# Altium PCB DE-300617.PcbDoc
Units mil, origin at the board's own origin, x right, y up, seen from the top; angles counter-clockwise.
Board outline 2362.2 x 2559.06 mil, 2 copper layers (Top Layer, Bottom Layer); 90 components, 61 nets, 277 pads, 54 vias.
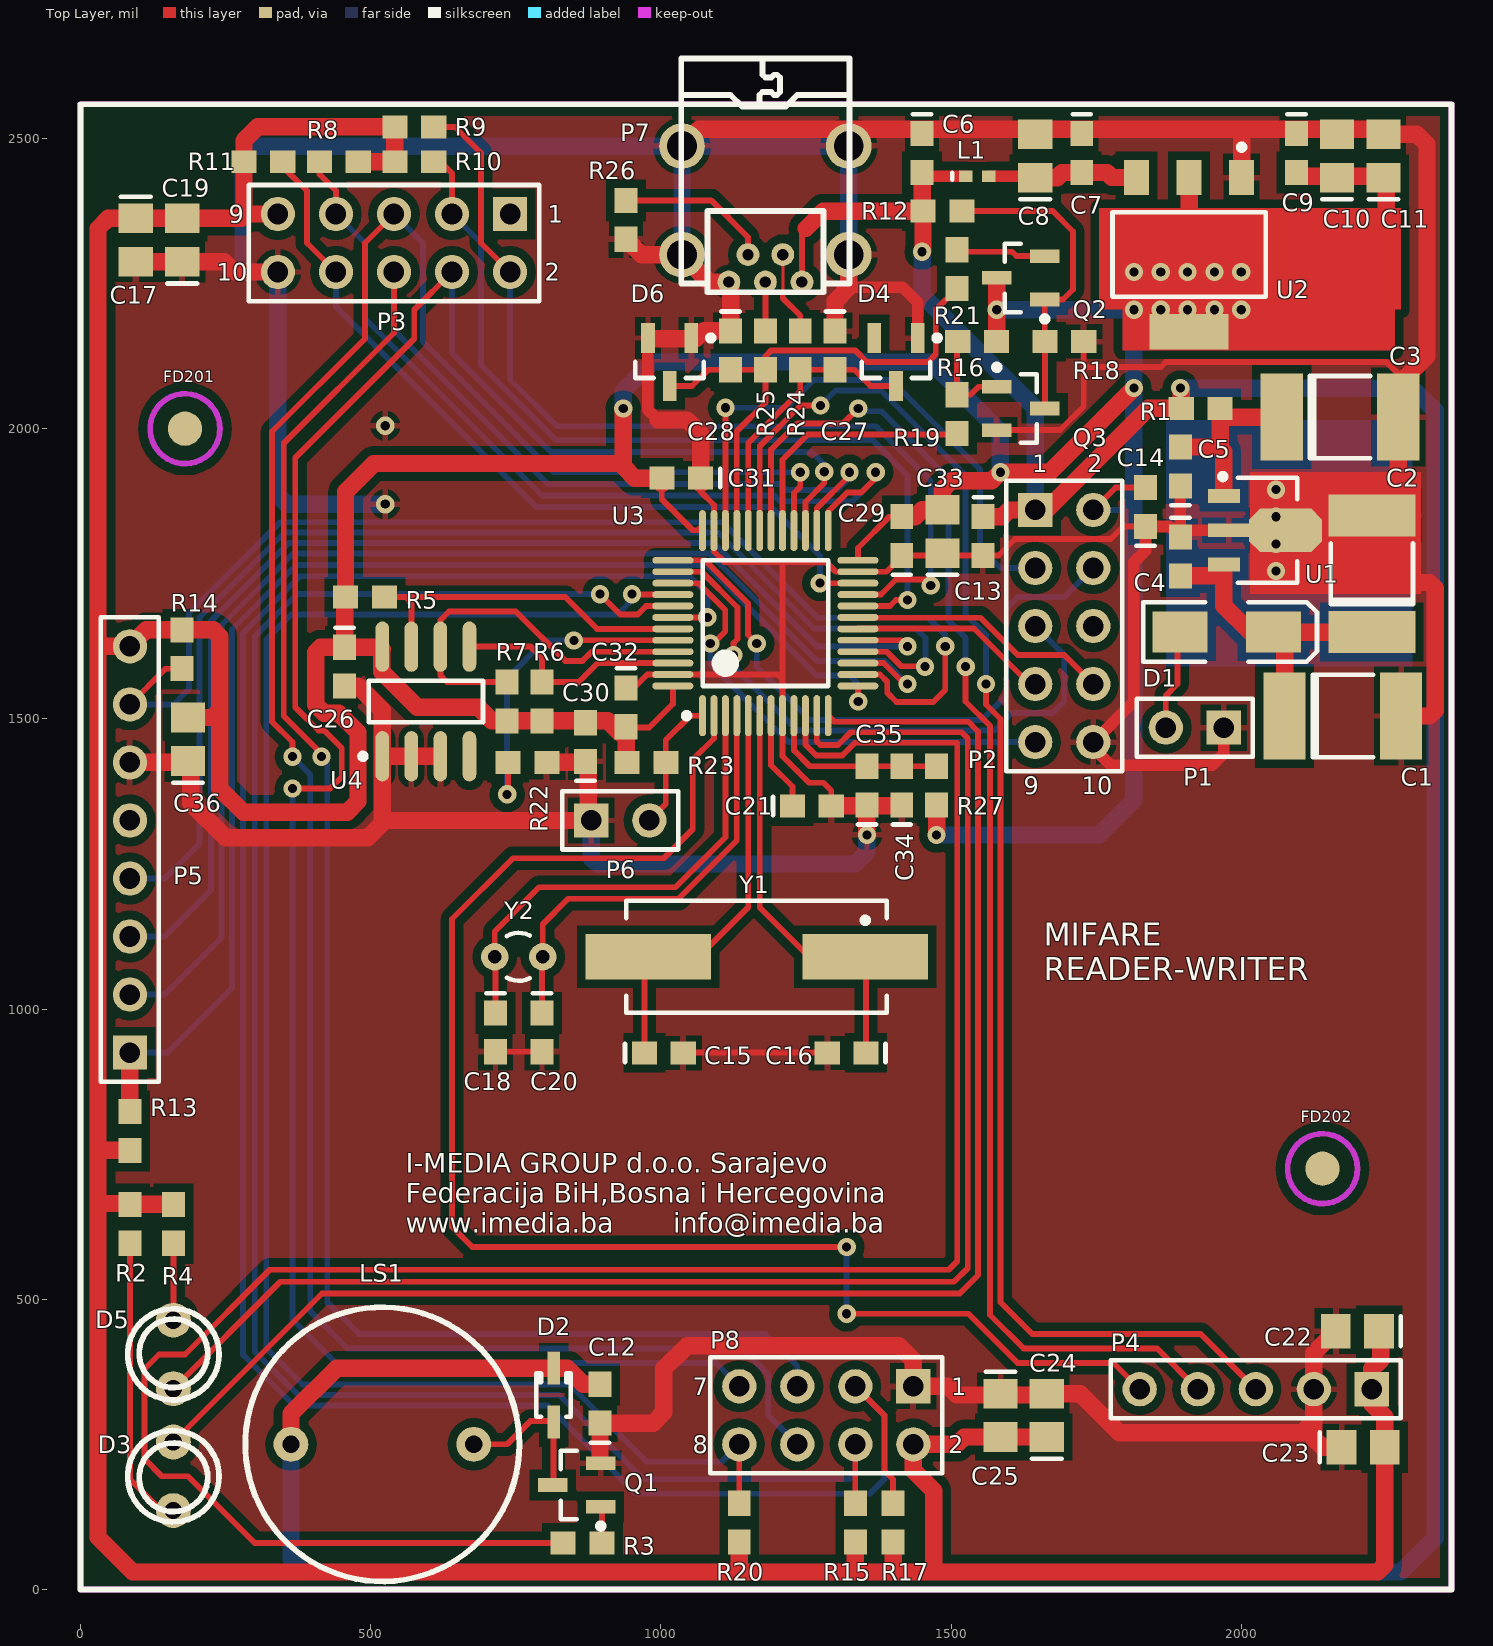
[diagram p0: Top Layer view]
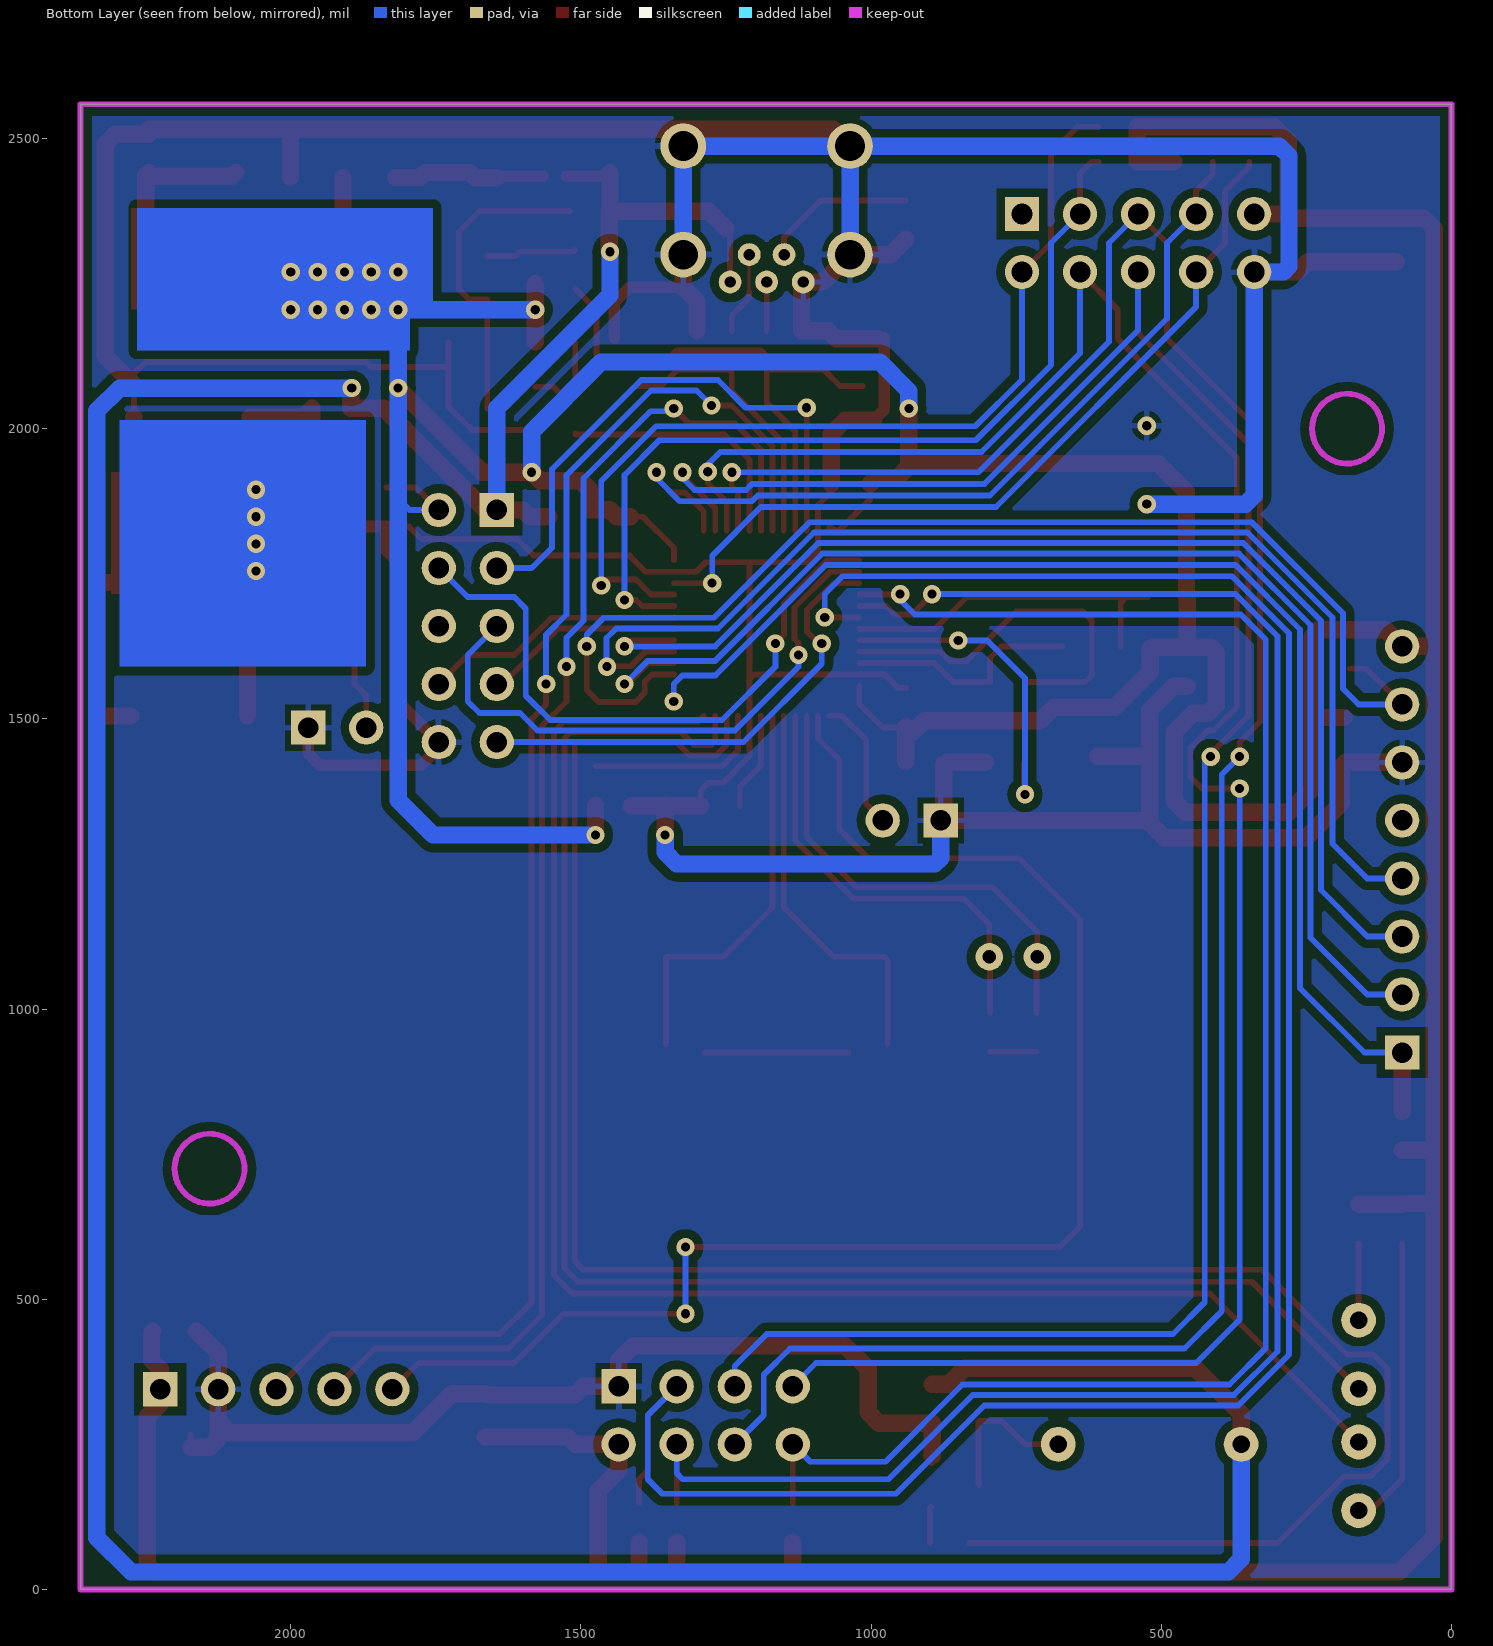
[diagram p1: Bottom Layer view, seen from below]

## Layer stack, top to bottom
Top Solder: solder mask 0.4, Solder Resist, Dk 3.5
Top Layer: signal copper 1.4
Dielectric 1: dielectric 12.6, FR-4, Dk 4.8
Bottom Layer: signal copper 1.4
Bottom Solder: solder mask 0.4, Solder Resist, Dk 3.5

## Board outline
0,0 2362.2,0 2362.2,2559.06 0,2559.06

## Design rules (kind name [scope] priority, off if disabled: settings)
Clearance [All] p1: gap=8 except(5: Arc-SMDPad Track-SMDPad SMDPad-SMDPad; 10: Arc-Arc Arc-Via Track-Via SMDPad-Via THPad-Via Via-Via; 15: Arc-Poly Track-Poly SMDPad-Poly THPad-Poly Via-Poly Fill-Poly Poly-Poly)
PolygonConnect [All] p1: connectstyle=Relief reliefconductorwidth=10 reliefentries=4 polygonreliefangle="90 Angle" airgapwidth=10
RoutingVias [All] p1: holewidth=15.75 width=31.5 viastyle="Through Hole" minholewidth=11.81 minwidth=23.62 maxholewidth=31.5 maxwidth=59.06
SolderMaskExpansion [All] p1: expansion=4
Width [All] p1: maxlimit=157.48 minlimit=5 preferedwidth=30
30 further rules are at their usual default settings.

## Components (designator, comment, footprint, x,y, rotation, side; value= is the part's Value field where it differs from the comment)
C1 "22uF" F 2175,1505 r0 top
C2 "22uF" F 2225,1750 r90 top
C3 "22uF" F 2170,2020 r0 top
C4 "100nF" 0603 1895,1780 r270 top
C5 "100nF" 0603 1895,1935 r90 top
C6 "10nF" 0603 1450,2475 r270 top
C7 "100nF" 0603 1725,2475 r270 top
C8 "" 0805 1645,2470 r90 top
C9 "100nF" 0603 2095,2475 r270 top
C10 "" 0805 2165,2470 r90 top
C11 "" 0805 2245,2470 r90 top
C12 "100nF" 0603 895,320 r90 top
C13 "100nF" 0603 1555,1815 r270 top
C14 "100nF" 0603 1835,1865 r90 top
C15 "22pF" 0603 1005,924.57 r0 top
C16 "22pF" 0603 1320,924.57 r180 top
C17 "" 0805 95,2325 r270 top
C18 "6p8" 0603 715,960 r270 top
C19 "" 0805 175,2325 r90 top
C20 "6p8" 0603 795,960 r270 top
C21 "100nF" 0603 1260,1350 r0 top
C22 "" 0805 2200,445 r180 top
C23 "" 0805 2210,245 r0 top
C24 "" 0805 1665,300 r90 top
C25 "" 0805 1585,300 r270 top
C26 "100nF" 0603 455,1590 r270 top
C27 "22pF" 0603 1300,2135 r270 top
C28 "22pF" 0603 1120,2135 r270 top
C29 "100nF" 0603 1415,1815 r90 top
C30 "100nF" 0603 870,1460 r90 top
C31 "100nF" 0603 1035,1915 r180 top
C32 "100nF" 0603 940,1520 r270 top
C33 "4u7" 0805 1485,1822.87 r90 top
C34 "1uF" 0603 1415,1385 r90 top
C35 "100nF" 0603 1355,1385 r90 top
C36 "C0805" 0805 185,1465 r90 top
D1 "1N4001" SMA 1975,1650 r0 top
D2 "NF" SOD323 815,335 r90 top
D3 "LED_GREEN" "LED 3mm" 160,195 r270 top
D4 "BZX84-3V6" SOT23_N 1405,2115 r270 top
D5 "LED_RED" "LED 3mm" 160,405 r90 top
D6 "BZX84-3V6" SOT23_N 1015,2115 r270 top
FD201 "Fiducial" Fiducial 180,2000 r270 top
FD202 "Fiducial" Fiducial 2140,725 r270 top (schematic designator FD201)
L1 "BLM15AG121" 0402-A 1545,2435 r0 top
LS1 "Buzzer 5Vdc" BUZZER 520,250 r0 top
P1 "DC_PWR" HDR1X2 1970,1485 r180 top
P2 "EXTEND" HDR2X5 1645,1860 r270 top
P3 "ENC28J60" HDR2X5 740,2370 r180 top
P4 "HC12_RADIO" HDR1X5 2225,345 r180 top
P5 "RC522" HDR1X8 85,925 r90 top
P6 "3V_BATT" HDR1X2 880,1325 r0 top
P7 "USB" "USB mini B" 1180,2300 r180 top
P8 "NRF24L01" HDR2X4 1435,350 r180 top
Q1 "MMBT2222" SOT23_N 855,180 r180 top
Q2 "MMBT2222" SOT23_N 1620,2260 r180 top
Q3 "MMBT2222" SOT23_N 1620,2035 r0 top
R1 "0R" ERA-0603 1930,2035 r0 top
R2 "220R" ERA-0603 85,630 r270 top
R3 "1K" ERA-0603 865,80 r180 top
R4 "220R" ERA-0603 160,630 r270 top
R5 "10K" ERA-0603 490,1710 r180 top
R6 "4K7" ERA-0603 795,1530 r270 top
R7 "4K7" ERA-0603 735,1530 r270 top
R8 "10K" ERA-0603 445,2460 r0 top
R9 "10K" ERA-0603 575,2520 r180 top
R10 "10K" ERA-0603 575,2460 r180 top
R11 "10K" ERA-0603 315,2460 r180 top
R12 "10K" ERA-0603 1485,2375 r0 top
R13 "10K" ERA-0603 85,790 r270 top
R14 "10K" ERA-0603 175,1620 r90 top
R15 "10K" ERA-0603 1335,115 r270 top
R16 "47K" ERA-0603 1545,2150 r180 top
R17 "10K" ERA-0603 1400,115 r270 top
R18 "33K" ERA-0603 1695,2150 r0 top
R19 "1K" ERA-0603 1510,2025 r90 top
R20 "10K" ERA-0603 1135,115 r270 top
R21 "1K5" ERA-0603 1510,2275 r90 top
R22 "10K" ERA-0603 770,1425 r0 top
R23 "0R" ERA-0603 975,1425 r180 top
R24 "22R" ERA-0603 1240,2135 r90 top
R25 "22R" ERA-0603 1180,2135 r90 top
R26 "100K" ERA-0603 940,2360 r90 top
R27 "0R" ERA-0603 1475,1385 r270 top
U1 "L78L05ACUTR" SOT-89_N 2045,1825 r0 top
U2 "REG1117-3.3" ZZ311 1910,2300 r180 top
U3 "STM32F103C8T6" STM-LQFP48_N 1180,1665 r90 top
U4 "FT24C128A" SOIC-SN8_N 595,1530 r90 top
Y1 "4MHz" HC49/4H_SMX 1165,1090 r180 top
Y2 "32.768MHz" R26 755,1090 r270 top

## Footprints (in the part's own frame and the unit in brackets; to place one, negate y for a bottom-side part, rotate by r counter-clockwise, add the part's x,y. Pads: shape width x height; smd on the part's side, far side on the other; paste and mask are expansions set on the pad)
0402-A [mm] "Chip Inductor, Body 1.0x0.5mm, IPC High Density"
  rect 0.6x0.5 smd: 1(-0.5,0) 2(0.5,0)
  silkscreen extent -1.1,-0.15 -1.1,0.15, body extent -0.55,-0.3 0.55,0.3, height 0.55
0603 [mm] "Chip Capacitor; Body 1.6 x 0.8 mm (LxW typ)"
  rect 1.1x1 smd: 1(-0.85,0) 2(0.85,0)
  silkscreen extent -1.7,-0.4 -1.7,0.4
0805 [mm] "Chip Capacitor; Body 2.0 x 1.2 mm (LxW typ)"
  rect 1.3x1.5 smd: 1(-0.95,0) 2(0.95,0)
  silkscreen extent -1.9,-0.65 -1.9,0.65
BUZZER [mil] "5Vdc PCB buzzer"
  round 60 hole 30: 1(-157.48,0) 2(157.48,0)
  silkscreen extent -236,-236 236,236, body extent -236,-236 236,236, height 378
ERA-0603 [mm] "Chip Resistor; Body 1.6 x 0.8 mm (LxW typ)"
  rect 1.1x1 smd: 1(-0.85,0) 2(0.85,0)
F [mm] "Chip Capacitor; Body 5.59 x 3.43 mm (LxW typ)"
  rect 1.85x3.8 smd: 1(-2.55,0) 2(2.55,0)
  silkscreen extent -1.33,-1.8 1.33,1.8
Fiducial [mm] "Pick and place machine mark"
  round 1.5 smd paste+0 mask+0.8: 3(0,0)
  Keep-Out Layer circle w0.254: c0,0 r1.529
HC49/4H_SMX [mm] "Surface Mount Quartz Crystal; Body 13.4 (inc. leads) x 4.9 mm (LxW max)"
  rect 5.5x2 smd: 1(-4.75,0) 2(4.75,0)
  silkscreen extent -5.7,-2.45 5.7,2.45
HDR1X2 [mm] "Connector; Header; 2 Position"
  rect 1.5x1.5 hole 0.9: 1(0,0)
  round 1.5 hole 0.9: 2(2.54,0)
  silkscreen extent -1.27,-1.27 3.81,1.27
HDR1X5 [mm] "Connector; Header; 5 Position"
  rect 1.5x1.5 hole 0.9: 1(0,0)
  round 1.5 hole 0.9: 2(2.54,0) 3(5.08,0) 4(7.62,0) 5(10.16,0)
  silkscreen extent -1.27,-1.27 11.43,1.27
HDR1X8 [mm] "Connector; Header; 8 Position"
  rect 1.5x1.5 hole 0.9: 1(0,0)
  round 1.5 hole 0.9: 2(2.54,0) 3(5.08,0) 4(7.62,0) 5(10.16,0) 6(12.7,0) 7(15.24,0) 8(17.78,0)
  silkscreen extent -1.27,-1.27 19.05,1.27
HDR2X4 [mm] "Connector; Header; 4x2 Position"
  rect 1.5x1.5 hole 0.9: 1(0,0)
  round 1.5 hole 0.9: 2(0,2.54) 3(2.54,0) 4(2.54,2.54) 5(5.08,0) 6(5.08,2.54) 7(7.62,0) 8(7.62,2.54)
  silkscreen extent -1.27,-1.27 8.89,3.81
HDR2X5 [mm] "Connector; Header; 5x2 Position"
  rect 1.5x1.5 hole 0.9: 1(0,0)
  round 1.5 hole 0.9: 2(0,2.54) 3(2.54,0) 4(2.54,2.54) 5(5.08,0) 6(5.08,2.54) 7(7.62,0) 8(7.62,2.54) 9(10.16,0) 10(10.16,2.54)
  silkscreen extent -1.27,-1.27 11.43,3.81
"LED 3mm" [mil] "LED 3mm"
  round 60 hole 30: 1(-59.06,0) 2(59.06,0)
  silkscreen extent -79,-79 79,79
R26 [mm] "Crystal, Thru-Hole; 2 Leads; Body 2.1 x 6.2 mm (Dia.xH)"
  round 1.2 hole 0.6: 1(0,1.05) 2(0,-1.05)
  silkscreen extent -1.05,-0.53 1.05,0.48
SMA [mm] "DO-214-AC/SMA; 2 C-Bend Leads; Body 5 x 2.7 mm, inc. leads (LxW)"
  rect 2.4x1.8 smd: 1(-2.05,0) 2(2.05,0)
  silkscreen extent -3.65,-1.3 3.95,1.3
SOD323 [mm] "SOD-323/SC-76; 2 Leads; Body 1.7 x 1.3 mm, (LxW)"
  rect 1.45x0.55 smd: 1(1.175,0) 2(-1.175,0)
  silkscreen extent -0.95,-0.75 0.95,0.75
SOIC-SN8_N [mm] "SOIC, 8-Leads, Body 4.9x3.8mm, Pitch 1.27mm, IPC Medium Density"
  oval 2.2x0.6 smd: 1(-2.4,1.905) 2(-2.4,0.635) 3(-2.4,-0.635) 4(-2.4,-1.905) 5(2.4,-1.905) 6(2.4,-0.635) 7(2.4,0.635) 8(2.4,1.905)
  silkscreen extent -2.52,-2.5 0.9,2.88, body extent -2,-2.5 2,2.5, height 1.75
SOT23_N [mm] "SOT23, 3-Leads, Body 2.9x1.3mm, Pitch 0.95mm, Lead Span 2.3mm, IPC Medium Density"
  rect 1.3x0.6 smd: 1(-1.05,0.95) 2(-1.05,-0.95) 3(1.05,0)
  silkscreen extent -1.17,-1.5 0.7,1.93, body extent -0.7,-1.5 0.7,1.5, height 1.1
SOT-89_N [mm] "SOT89, 3-Leads, Body 4.5x2.4 mm, Pitch 1.5mm, Lead Span 4.1mm, IPC Medium Density"
  rect 1.4x0.6 smd: 1(-1.9,1.5) 3(-1.9,-1.5)
  rect 1.8x0.6 smd: 2(-1.7,0)
  oct 3.2x1.9 smd: 2(0.8,0)
  silkscreen extent -2.07,-2.3 1.3,2.47, body extent -1.3,-2.3 1.3,2.3, height 1.6
STM-LQFP48_N [mm] "QFP, 48-Leads, Body 7x7mm, Pitch 0.5mm, IPC Medium Density"
  oval 1.8x0.3 smd: 1(-4.05,2.75) 2(-4.05,2.25) 3(-4.05,1.75) 4(-4.05,1.25) 5(-4.05,0.75) 6(-4.05,0.25) 7(-4.05,-0.25) 8(-4.05,-0.75) 9(-4.05,-1.25) 10(-4.05,-1.75) 11(-4.05,-2.25) 12(-4.05,-2.75) 25(4.05,-2.75) 26(4.05,-2.25) 27(4.05,-1.75) 28(4.05,-1.25) 29(4.05,-0.75) 30(4.05,-0.25) 31(4.05,0.25) 32(4.05,0.75) 33(4.05,1.25) 34(4.05,1.75) 35(4.05,2.25) 36(4.05,2.75)
  oval 0.3x1.8 smd: 13(-2.75,-4.05) 14(-2.25,-4.05) 15(-1.75,-4.05) 16(-1.25,-4.05) 17(-0.75,-4.05) 18(-0.25,-4.05) 19(0.25,-4.05) 20(0.75,-4.05) 21(1.25,-4.05) 22(1.75,-4.05) 23(2.25,-4.05) 24(2.75,-4.05) 37(2.75,4.05) 38(2.25,4.05) 39(1.75,4.05) 40(1.25,4.05) 41(0.75,4.05) 42(0.25,4.05) 43(-0.25,4.05) 44(-0.75,4.05) 45(-1.25,4.05) 46(-1.75,4.05) 47(-2.25,4.05) 48(-2.75,4.05)
  silkscreen extent -4.17,-2.75 2.75,3.57, body extent -3.5,-3.5 3.5,3.5, height 1.6
"USB mini B" [mm] "PCB USB troughole connector, type B, mini"
  round 1 hole 0.5: 1(-1.6,1.2) 2(-0.762,0) 3(0,1.2) 4(0.762,0) 5(1.6,1.2)
  round 2 hole 1.3: 6(-3.65,0) 6(-3.65,-4.75) 6(3.65,0) 6(3.65,-4.75)
  silkscreen extent -3.68,-8.58 3.68,1.65, body extent -3.68,-8.64 3.68,1.27, height 4
ZZ311 [mm] "SOT-223/SC-73; 4 Leads; Body 6.7 x 7.3 mm, inc. leads (LxW max)"
  rect 1.1x1.55 smd: 1(-2.3,-3.375) 2(0,-3.375) 3(2.3,-3.375)
  rect 3.45x1.55 smd: 4(0,3.375)
  silkscreen extent -3.35,-4.82 3.35,1.85

## Part data
C1 C2 C3: library part 194D226X0015F2, "Midget Conformal Coated Solid Tantalum Chip Capacitor: 22uF, 20% Tolerance, 15 WVDC @ +85°C, Surge = 20V"
C4 C5 C6 C7 C9 C12 C13 C14 C15 C16 C18 C20 C21 C26 C27 C28 C29 C30 C31 C32 C34 C35: library part C0603, "Ceramic Chip Capacitor - Standard"
C8 C10 C11 C17 C19 C22 C23 C24 C25 C33: library part C0805, "Ceramic Chip Capacitor - Standard"
C36: "Ceramic Chip Capacitor - Standard"
D1: library part 10MQ060N, "Schottky Rectifier"
D2: library part BAS321, "General-purpose Diode"
D3 D5: library part "LED 3mm"
D4 D6: library part BZX84-A4V7, "Voltage Regulator Diode"
FD201 FD202: library part Fiduchial, "Fiduchial mark"
L1: library part "Chip inductor", "SMD chip inductor"
LS1: library part BUZZER, "5Vdc PCB buzzer"
P1 P6: library part "Header 2", "Header, 2-Pin"
P2 P3: library part "Header 5X2", "Header, 5-Pin, Dual row"
P4: library part "Header 5", "Header, 5-Pin"
P5: library part "Header 8", "Header, 8-Pin"
P7: library part "USB mini B", "USB connector B mini"
P8: library part "Header 4X2", "Header, 4-Pin, Dual row"
Q1 Q2 Q3: library part BC817, "NPN General-purpose Transistor"
R1 R2 R3 R4 R5 R6 R7 R8 R9 R10 R11 R12 R13 R14 R15 R16 R17 R18 R19 R20 R21 R22 R23 R27: library part ERAV, "Metal Film Thermosensitive Chip Resistor, 0.56 Ohm to 10k Ohm Range, 5% Tolerance, 0603 Size, 0.063 W"
R24 R25 R26: library part ERA3Y, "Rectangular Thick Film Chip Resistor, 10 Ohm to 330k Ohm Range, 0.1% and 0.5% Tolerance, 0603 Size, 0.063 W"
U1: "Positive Voltage Regulator, 5V, 4-Pin SOT-89, Tape and Reel"
U2: "800mA and 1A Low Dropout Positive Regulator 2.85V, 3.3V, 5V, and Adjustable"
U3: "ARM Cortex-M3 32-bit MCU, 64 KB Flash, 20 KB Internal RAM, 37 I/Os, 48-pin LQFP, -40 to 85 degC, Tray"
U4: library part 24AA64/SN, "64Kbit, 400kHz, 1.7V, I2C Serial EEPROM, 8-Pin SOIC 150mil, Commercial Temperature"
Y1: library part HC49/4H_SMX, "Surface Mount Quartz Crystal"
Y2: library part R26-32.768, "Tuning Fork Crystal Unit"

## Via types
v1: diameter 31.5, hole 15.75, Top Layer to Bottom Layer, 54 vias

## Nets (pads, with @x,y where several pads share a name; then routed paths per layer and width w, separated by ;. In a path a pad name is that pad's centre, name@x,y a point inside that pad or via, vN(x,y) a via of type N, cw(c..) or ccw(c..) an arc to the next point about the centre after c; other vN are vias at no path point)
+3V3: C9.2 C10.1 C11.1 C14.2 C17.1 C19.2 C22.1 C23.2 C24.1 C25.2 C26.1 C29.2 C30.2 C31.2 C32.2 C33.2 C36.2 P2.2 P3.9 P4.1 P5.8 P8.2 Q2.3 R2.1 R4.1 R5.2 R6.2 R7.2 R8.2 R9.2 R10.2 R11.2 R13.2 R14.2 R15.2 R16.1 R17.2 R20.2 R23.2 R27.2 U2.2 U2.4 U3.24 U3.36 U3.48 U4.8 | length 13122
  Top Layer w10: C32.2@929.23,1475.77 C32.2 941.54,1485 980,1485 1020.55,1525.55 U3.48 ; R23.2@940,1426.54 R23.2 ; C31.2@1001.54,1905 1001.54,1878.46 1055,1825 1063.46,1825 1071.73,1833.27 U3.36 ; U3.24 1339.45,1794.45 1393.46,1848.46 C29.2 ; R16.1 R16.1@1578.66,2150.2 ; P2.2 1783.46,1898.46 C14.2 ; C9.2 C9.2@2095.06,2441.47
  Top Layer w30: R13.2 31.54,756.54 30,755 ; R4.1 R2.1 83.46,665 30,665 ; C36.2 227.4,1502.4 240,1515 ; P3.9 285,2370 281.54,2366.54 ; R8.2 R10.2 R9.2 305,2520 281.54,2496.54 R11.2 281.54,2366.54 ; U4.8@518.98,1618.98 518.98,1581.02 580,1520 685,1520 708.46,1496.54 R7.2 R6.2 908.46,1496.54 C32.2@929.23,1475.77 ; U4.8@520,1620 516.54,1623.46 C26.1 ; 935,1935 955,1915 991.54,1915 C31.2@1001.54,1905 ; v1(935,2035) 935,1940 505,1940 456.54,1891.54 R5.2 455,1708.46 C26.1 ; R23.2@940,1426.54 C32.2 ; R20.2 1135,30 ; R15.2 1335,35 1330,30 ; R17.2 1400,30 ; C29.2 1438.46,1848.46 1450.28,1860.28 C33.2 1485,1895 1500,1910 1570,1910 v1(1585,1925) 1670,1925 v1(1815,2070) ; 1470,30 1470,170 1435,205 P8.2 1510,250 1522.6,262.6 C24.1 ; v1(1475,1300) R27.2 ; R16.1@1578.66,2150.2 v1(1578.66,2205) Q2.3@1578.66,2250 ; 1910,2360 U2.2 ; C9.2 2101.54,2435 2238.53,2435 2245,2441.47 2250,2436.47 2250,2365 ; C22.1 2240,442.4 2240,395 2225,380 P4.1 2225,320 2247.4,297.6 C23.2 2247.4,42.4 2235,30 1400,30 ; 30,665 30,90 90,30 1135,30 ; 30,665 30,755 ; 30,755 30,1625 ; 30,1625 30,2345 47.4,2362.4 C17.1 C19.2 277.4,2362.4 281.54,2366.54 ; 30,1625 P5.8 113.46,1653.46 R14.2 228.46,1653.46 240,1641.93 240,1515 ; 240,1515 240,1380 280.75,1339.25 459.25,1339.25 478,1358 478,1477 445.2,1509.8 419.8,1509.8 405,1524.6 405,1615 413.46,1623.46 C26.1 ; 1135,30 1330,30 ; 1330,30 1400,30
  Bottom Layer w10: P2.2 1795,1860 1815,1880
  Bottom Layer w30: v1(935,2035) 935,2065 985,2115 1465,2115 1585,1995 v1(1585,1925) ; v1(1475,1300) 1755,1300 1815,1360 1815,1880 v1(1815,2070) v1(1815,2205) v1(1578.66,2205)
  other v1: 1861.25,2205 1907.5,2205 1953.75,2205 2000,2205 1815,2270 1861.25,2270 1907.5,2270 1953.75,2270 2000,2270
+5V_USB: C6.2 C12.2 C13.1 D2.1 L1.1 LS1.1 P2.1 P7.1 R1.1 R12.1 | length 6734.4
  Top Layer w10: P7.1 1242.99,2337.99 1250,2345
  Top Layer w20: C6.2 1456.54,2435 L1.1
  Top Layer w30: LS1.1 362.52,302.52 441.26,381.26 D2.1 838.74,381.26 866.54,353.46 C12.2 ; 1250,2345 1280,2375 R12.1 ; v1(1450,2305) 1451.54,2306.54 R12.1 ; C6.2 1450,2376.54 R12.1 ; C13.1 1588.46,1848.46 1600,1860 P2.1 1665,1860 1840,2035 R1.1 1896.54,2068.46 v1(1895,2070)
  Bottom Layer w30: LS1.1 362.52,52.48 385,30 2275,30 2334.2,89.2 2334.2,2030.8 2295,2070 v1(1895,2070) ; v1(1450,2305) 1450,2230 1645,2035 P2.1
AUX_0: P2.5 U3.38 | length 1028.8
  Top Layer w10: U3.38 1070.36,1753.58 1132,1691.94 1132,1637.54 1125,1630.54 v1(1125,1610)
  Bottom Layer w10: v1(1125,1610) 1125,1590 1235,1480 1575,1480 1605,1510 1675,1510 1695,1530 1695,1610 P2.5
AUX_1: P2.6
AUX_2: P2.7 U3.18 | length 345.5
  Top Layer w10: U3.18 1340.04,1655.75 1539.25,1655.75 1635,1560 P2.7
AUX_3: P2.8 U3.19 | length 453.1
  Top Layer w10: U3.19 1340.04,1674.25 1550.75,1674.25 1615,1610 1695,1610 P2.8
AUX_4: P2.9 U3.39 | length 831.6
  Top Layer w10: U3.39 1064.59,1733.9 1110.75,1687.74 1110.75,1650.75 1090,1630 v1(1085,1630)
  Bottom Layer w10: v1(1085,1630) 1085,1595 1220,1460 P2.9
BOOT0: R22.1 U3.44 | length 568.3
  Top Layer w10: v1(735,1370) 736.54,1371.54 R22.1 ; v1(850,1635) 850.47,1635.47 U3.44
  Bottom Layer w10: v1(735,1370) 735,1570 800,1635 v1(850,1635)
BUZZER: R3.2 U3.10 | length 3635.8
  Top Layer w10: R3.2 300,80 185,195 140,195 110,225 110,380 135,405 180,405 326,551 1496,551 1510.54,565.54 1510.54,1459 1334.46,1459 1312.46,1437 1267.54,1437 1248.9,1455.65 U3.10
EE_WP: R5.1 U3.43 U4.7 | length 609.5
  Top Layer w10: R5.1 560,1710 ; U4.7 570,1700 560,1710 ; U3.43 889.84,1655.16 835,1710 560,1710
ENC28J60_CLK: P3.1
ENC28J60_CS: P3.7 R8.1 U3.25 | length 1488.1
  Top Layer w10: R8.1 411.54,2438.46 440,2410 P3.7 ; U3.25 1288.27,1857.36 1320.91,1890 1345,1890 1370,1915 v1(1370,1925)
  Bottom Layer w10: P3.7 490,2320 490,2190 795,1885 1195.46,1885 1205.46,1875 1330,1875 1370,1915 v1(1370,1925)
ENC28J60_INT: P3.2 R9.1 U3.21 | length 1628.7
  Top Layer w10: R9.1 645,2520 690,2475 690,2320 P3.2 ; U3.21 1379.21,1714.21 1405,1740 1455,1740 v1(1465,1730)
  Bottom Layer w10: P3.2 740,2085 820.75,2004.25 1370.75,2004.25 1465,1910 v1(1465,1730)
ENC28J60_RST: P3.8 R11.1 U3.22 | length 1412.2
  Top Layer w10: R11.1 348.46,2451.54 390,2410 390,2320 P3.8 ; v1(1273.9,1733.9) U3.22
  Bottom Layer w10: P3.8 440,2210 785,1865 1190,1865 1273.9,1781.1 v1(1273.9,1733.9)
ENC28J60_WOL: P3.3 R10.1 U3.20 | length 1509.4
  Top Layer w10: R10.1 620,2460 640,2440 P3.3 ; U3.20 1394.53,1694.53 1405,1705 v1(1425,1705)
  Bottom Layer w10: P3.3 690,2320 690,2109.54 819.54,1980 1365,1980 1425,1920 v1(1425,1705)
HC12_SET: P4.5 U3.2 | length 2609.4
  Top Layer w10: U3.2 1091.42,1466.42 1055,1430 1055,1310 1005,1260 745,1260 640,1155 640,625 675,590 v1@1330,590 ; v1(1320,475) 1530,475 1615,390 1780,390 P4.5
  Bottom Layer w10: v1(1320,475) 1320,575 1330,585 1325,590 v1(1320,590)
I2C1_SCL: R7.1 U3.45 U4.6 | length 663.3
  Top Layer w10: R7.1 631.54,1563.46 620,1575 U4.6 620,1670 635,1685 750,1685 835,1600 865,1600 880.79,1615.79 U3.45
I2C1_SDA: R6.1 U3.46 U4.5 | length 414.1
  Top Layer w10: U4.5 670.51,1625 775,1625 795,1605 R6.1 858.46,1563.46 891.1,1596.1 U3.46
LED_GREEN: D3.1 U3.12 | length 2712
  Top Layer w10: D3.1 415.94,510 1515,510 1546.54,541.54 1546.54,1478.46 1530,1495 1298.82,1495 U3.12
LED_RED: D5.1 U3.11 | length 2687.7
  Top Layer w10: D5.1 344.06,530 1505,530 1528.54,553.54 1528.54,1466.46 1518,1477 1327,1477 1305,1455 1275,1455 1268.58,1461.42 U3.11
MIFARE_CS: P5.1 R13.1 U3.13 | length 2208.5
  Top Layer w10: U3.13 1339.45,1530.55 v1(1340,1530)
  Top Layer w30: R13.1 P5.1
  Bottom Layer w10: P5.1 150,925 261,1036 261,1654.18 371.82,1765 1078.18,1765 1268.18,1575 1325,1575 1340,1560 v1(1340,1530)
MIFARE_IRQ: P5.5
MIFARE_RST: P5.7 R14.1 U3.14 | length 2091.9
  Top Layer w10: P5.7 146.54,1586.54 R14.1 ; U3.14 1377.67,1576.42 1390,1564.09 1390,1545 1405.75,1529.25 1469.25,1529.25 1490,1550 v1(1490,1625)
  Bottom Layer w10: P5.7 160,1525 187,1552 187,1682 344,1839 1106,1839 1270.75,1674.25 1460.75,1674.25 1490,1645 v1(1490,1625)
NetC1_1: C1.1 C2.1 C4.2 D1.2 U1.3 | length 557.5
  Top Layer w30: C4.2 1966.54,1746.54 1970,1750 1970,1695 2015,1650 D1.2 D1.2@2056.1,1649.61 ; C1.1 2074.61,1631.1 D1.2@2056.1,1649.61 ; C2.1 D1.2@2056.1,1649.61
NetC3_1: C3.1 C5.2 R1.2 U1.1 | length 319.3
  Top Layer w30: C5.2 1961.54,1968.46 1963.46,1966.54 ; 1970,1900 1970,1960 1963.46,1966.54 ; C3.1 1978.46,2020 R1.2 1963.46,1966.54
NetC7_2: C7.2 C8.1 L1.2 U2.3 | length 263
  Top Layer w20: L1.2 1642.6,2435 C8.1
  Top Layer w30: C8.1 1682.6,2432.6 1691.54,2441.54 C7.2 1768.46,2441.54 1777.13,2432.87 U2.3
NetC34_2: C34.2 C35.2 R27.1 U3.9 | length 316.9
  Top Layer w10: U3.9 1229.21,1445.79 1256.54,1418.46 R27.1
NetD1_1: D1.1 P1.2 | length 175.1
  Top Layer w10: P1.2 1870,1540 1890,1560 1890,1645.71 D1.1
NetD2_2: D2.2 LS1.2 Q1.3 | length 263.9
  Top Layer w10: LS1.2 735,250 775,290 813.74,290 D2.2 815,181.34 Q1.3
NetD3_2: D3.2 R2.2 | length 503.9
  Top Layer w10: R2.2 85,190 139.06,135.94 D3.2
NetD5_2: D5.2 R4.2 | length 132.5
  Top Layer w10: D5.2 R4.2
NetP6_2: P6.2 R23.1 U3.1 | length 231
  Top Layer w10: P6.2 1008.46,1353.46 R23.1 1008.46,1463.46 1050.55,1505.55 U3.1
NetP7_2: P7.2 R24.2 | length 144
  Top Layer w5: 1210.19,2235.13 P7.2@1210.19,2300
  Top Layer w10: 1210,2235.13 1210,2225 1240,2195 R24.2
NetP7_3: P7.3 R25.2 | length 84.3
  Top Layer w10: R25.2 P7.3
NetP7_4: P7.4 R26.2 | length 266.3
  Top Layer w10: R26.2 1086.54,2393.46 1150,2330 P7.4
NetQ1_1: Q1.1 R3.1 | length 63.5
  Top Layer w10: Q1.1 898.46,140.47 R3.1
NetQ2_1: Q2.1 Q3.3 R12.2 R18.1 | length 549.7
  Top Layer w10: R12.2 1675,2375 1710,2340 1710,2240 1692.6,2222.6 Q2.1 1661.34,2150.2 R18.1 1661.54,2035.2 Q3.3
NetQ2_2: Q2.2 R21.2 | length 155.9
  Top Layer w10: R21.2 1513.46,2305 1605,2305 1612.6,2297.4 Q2.2
NetQ3_1: Q3.1 R16.2 R19.2 | length 166.6
  Top Layer w10: R16.2 1510,2148.46 R19.2 1533.46,2058.46 1547.4,2072.4 Q3.1
NRF24L01_CE: P8.3 R17.1 U3.42 | length 3819.7
  Top Layer w10: U3.42 v1@1080,1674.84 ; P8.3 1385,300 1385,205 1400,190 R17.1
  Bottom Layer w10: v1(1080,1675) 1080,1715 1049.25,1745.75 378.03,1745.75 280,1647.72 280,404.54 367.54,317 805,317 957,165 1360,165 1385,190 1385,300 P8.3
NRF24L01_CSN: P8.4 R15.1 U3.41 | length 3296.8
  Top Layer w10: v1(895,1715) 900.75,1720.75 900.75,1709.25 930,1680 960,1680 974.53,1694.53 U3.41 ; R15.1 P8.4
  Bottom Layer w10: v1(895,1715) 372.73,1715 300,1642.27 300,410 375,335 825,335 970,190 1325,190 1335,200 P8.4
NRF24L01_IRQ: P8.8 R20.1 U3.40 | length 2970.4
  Top Layer w10: v1(950,1715) 950.79,1714.21 U3.40 ; R20.1 P8.8
  Bottom Layer w10: v1(950,1715) 950,1705 925,1680 363.19,1680 320,1636.81 320,415.46 382.46,353 842.46,353 975.46,220 1105,220 P8.8
NRST: C21.1 U3.7 | length 170.8
  Top Layer w10: U3.7 1189.84,1420.16 1226.54,1383.46 C21.1
OSC32_IN: C18.1 U3.3 Y2.2 | length 814.9
  Top Layer w10: C18.1 715,1088.66 Y2.2 713.66,1133.66 790,1210 1025,1210 1111.1,1296.1 U3.3
OSC32_OUT: C20.1 U3.4 Y2.1 | length 762.7
  Top Layer w10: C20.1 795,1088.66 Y2.1 796.34,1146.34 840,1190 1030.46,1190 1130.79,1290.33 U3.4
OSC_IN: C15.1 U3.5 Y1.2 | length 690.6
  Top Layer w10: C15.1@971.54,940 971.54,1083.54 Y1.2 1065,1090 1150.47,1175.47 U3.5
OSC_OUT: C16.1 U3.6 Y1.1 | length 698.3
  Top Layer w10: U3.6 1170.16,1174.84 1255,1090 Y1.1 1353.46,1088.54 C16.1@1353.46,940
SPI1_MISO: P5.4 U3.16 | length 2097.6
  Top Layer w10: U3.16 1389.21,1615.79 1414.25,1590.75 1454.25,1590.75 v1(1455,1590)
  Bottom Layer w10: P5.4 145,1225 205,1285 205,1674.54 351.46,1821 1098.54,1821 1263.8,1655.75 1439.25,1655.75 1455.78,1639.22 v1@1455.78,1590 ; v1@1454.25,1590.75 v1(1455,1590)
SPI1_MOSI: P5.3 U3.17 | length 2056.3
  Top Layer w10: U3.17 1414.53,1635.47 v1(1425,1625)
  Bottom Layer w10: P5.3 145,1125 225,1205 225,1669.09 358.91,1803 1091.09,1803 1269.09,1625 v1(1425,1625)
SPI1_SCK: P5.2 U3.15 | length 2164
  Top Layer w10: U3.15 1383.44,1596.1 1419.54,1560 v1(1425,1560)
  Bottom Layer w10: P5.2 145,1025 243,1123 243,1661.63 366.37,1785 1083.63,1785 1268.63,1600 1385,1600 v1(1425,1560)
SPI2_MISO: P3.4 P8.7 U3.27 | length 3835.1
  Top Layer w10: v1(365,1380) 430,1380 450,1400 450,1450 420,1480 410,1480 370,1520 370,1950 575,2155 575,2205 P3.4 ; U3.27 1248.9,1873.9 1281.5,1906.5 v1(1281.5,1925.75)
  Bottom Layer w10: v1(365,1380) 365,465 440,390 1095,390 P8.7 ; P3.4 640,2130 810,1960 1260,1960 1281.5,1938.5 v1(1281.5,1925.75)
SPI2_MOSI: P3.5 P8.6 U3.28 | length 4069.1
  Top Layer w10: v1(365,1435) 365,1460 330,1495 330,1995 490,2155 490,2320 P3.5 ; U3.28 1229.21,1889.21 1240,1900 v1(1240,1925)
  Bottom Layer w10: v1(365,1435) 395.75,1404.25 395.75,479.25 460,415 1140,415 1185,370 1185,300 P8.6 ; P3.5 590,2320 590,2150 815,1925 v1(1240,1925)
SPI2_SCK: P3.6 P8.5 U3.26 | length 3923
  Top Layer w10: v1@425,1438.48 416.52,1438.48 350,1505 350,1975 540,2165 P3.6 ; U3.26 1268.58,1863.13 1325,1919.54 v1(1325,1925)
  Bottom Layer w10: v1(415,1435) 425,1425 425,495 480,440 1180,440 1235,385 P8.5 ; P3.6 540,2169.54 804.54,1905 1205,1905 1215.75,1894.25 1304.25,1894.25 1325,1915 v1(1325,1925)
SWCLK: P2.4 U3.37 | length 1090.2
  Top Layer w10: U3.37 1076.13,1773.27 1150,1699.4 1150,1645 v1(1165,1630)
  Bottom Layer w10: v1(1165,1630) 1165,1590 1257,1498 1553,1498 1595,1540 1595,1690 1615,1710 1695,1710 P2.4
SWDIO: P2.3 U3.34 | length 978.5
  Top Layer w10: U3.34 v1(1111.1,2036.1)
  Bottom Layer w10: v1(1111.1,2036.1) 1216.1,2036.1 1263.75,2083.75 1396.25,2083.75 1550,1930 1550,1795 1585,1760 P2.3
USART1_RX: P4.3 U3.31 | length 2552.2
  Top Layer w10: U3.31 1170.16,1969.7 1240.46,2040 v1(1275,2040) ; v1(1560,1560) 1560,1525 1585,1500 1585,495 1640,440 1930,440 P4.3
  Bottom Layer w10: v1(1275,2040) 1300.75,2065.75 1379.25,2065.75 1525,1920 1525,1680 1560,1645 v1(1560,1560)
USART1_TX: P4.4 U3.30 | length 2406.6
  Top Layer w10: U3.30 1189.84,1963.93 1235.16,2009.25 1314.25,2009.25 v1(1340,2035) ; v1(1525,1590) 1525,1530 1567,1488 1567,473 1625,415 1855,415 P4.4
  Bottom Layer w10: v1(1340,2035) 1345.46,2035 1350.46,2030 1380,2030 1495.75,1914.25 1495.75,1669.25 1525,1640 v1(1525,1590)
USB_DM: C27.2 D4.3 R24.1 U3.32 | length 490.7
  Top Layer w10: U3.32 1150.47,1975.47 1240,2065 R24.1 C27.2 1333.46,2101.54 1361.34,2073.66 D4.3
USB_DP: C28.2 D6.3 R21.1 R25.1 U3.33 | length 937.2
  Top Layer w10: D6.3 1053.66,2073.66 1081.54,2101.54 C28.2 R25.1 ; U3.33 1130.79,1995.79 1180,2045 R25.1 ; R21.1 1473.46,2205 1473.46,2128.46 1460,2115 1355,2115 1335,2135 1190,2135 1180,2125 R25.1
USB_SEL: R19.1 U3.29 | length 441.4
  Top Layer w10: U3.29 1209.53,1911.99 1209.25,1912.26 1209.25,1937.74 1209.53,1938.01 1209.53,1946.54 1252.99,1990 1508.46,1990 R19.1
VSS: C1.2 C2.2 C3.2 C4.1 C5.1 C6.1 C7.1 C8.2 C9.1 C10.2 C11.2 C12.1 C13.2 C14.1 C15.2 C16.2 C17.2 C18.2 C19.1 C20.2 C21.2 C22.2 C23.1 C24.2 C25.1 C26.2 C27.1 C28.1 C29.1 C30.1 C31.1 C32.1 C33.1 C34.1 C35.1 C36.1 D4.1 D6.1 D6.2 P1.1 P2.10 P3.10 P4.2 P5.6 P6.1 P7.5 P7.6 P8.1 Q1.2 Q3.2 R18.2 R22.2 R26.1 U1.2 U2.1 U3.8 U3.23 U3.35 U3.47 U4.1 U4.2 U4.3 | length 13842.3
  Top Layer w10: C36.1@182.4,1425 C36.1 ; C18.2 C20.2 ; C30.1@868.46,1425 C30.1 C30.1@875,1421.54 ; P6.1@875,1330 P6.1 ; Q1.2@895,218.74 Q1.2 ; C32.1 953.46,1553.46 976.42,1576.42 U3.47 1201.42,1576.42 1209.53,1568.31 ; C15.2@1038.46,925 C16.2@1286.54,925 ; C31.1@1068.46,1905 1068.46,1891.54 1091.42,1868.58 U3.35 1091.42,1788.58 1110,1770 1210,1770 ; C21.2 1293.46,1376.54 1280,1390 1255,1390 1209.53,1435.47 U3.8 1209.53,1568.31 ; C34.1@1413.46,1350 C34.1 ; Q3.2 1687.6,1997.6 1728.46,2038.46 1728.46,2106.54 ; C24.2@1662.6,335 C24.2 ; R18.2 1728.46,2106.54 ; C14.1 1796.54,1831.54 1775,1810 1610,1810 1581.54,1781.54 C13.2 C29.1 1415,1780 1388.58,1753.58 U3.23 1301.42,1753.58 1285,1770 1210,1770 ; C23.1 C23.1@2172.6,267.4 ; C3.2 C3.2@2270.39,2070 ; C3.2@2270.39,2075.39 2270.39,2094.61 2250,2115 1870,2115 1861.54,2106.54 1728.46,2106.54 ; 1209.53,1568.31 1209.53,1769.53 1210,1770
  Top Layer w20: D6.2 977.6,2032.4 995,2015 ; 1323.7,2243.7 1416.3,2243.7 1442.4,2217.6 D4.1 ; C5.1 C4.1 ; P1.1 1970,1440 1950,1420 1775,1420 1745,1450 P2.10 1815,1530 1815,1770 1835,1790 C14.1 1876.93,1831.54 C4.1 ; 2145,1825 1906.54,1825 C4.1
  Top Layer w30: P5.6 182.4,1425 190,1417.4 190,1355 250,1295 495,1295 520,1320 ; C17.2 C19.1 247.4,2287.6 265,2270 P3.10 ; C26.2 478.46,1556.54 520,1515 U4.1 ; U4.3@610,1435.51 U4.2 U4.1 ; R22.2 C30.1@868.46,1425 ; P6.1@875,1330 C30.1@875,1421.54 ; P6.1 520,1325 U4.1 ; 895,230 C12.1 986.54,286.54 1005,305 1005,380 1045,420 1410,420 1435,395 P8.1 1495,350 1510,335 C24.2@1662.6,335 ; R26.1 966.54,2300 1036.3,2300 1083.54,2252.76 P7.5 1120,2249.76 C28.1 1073.46,2168.46 1060,2155 990,2155 ; 995,2015 1045,2015 1068.46,1991.54 C31.1@1068.46,1905 ; P7.6@1036.3,2487.01 1065.57,2516.28 2000,2516.28 ; C21.2 C35.1@1355,1350 ; C27.1 1300,2220 1323.7,2243.7 P7.6@1323.7,2300 ; v1(1355,1300) C35.1@1355,1350 ; C35.1 C35.1@1355,1350 ; C34.1@1413.46,1350 C35.1@1355,1350 ; C24.2 1722.6,337.4 1790,270 2105,270 2125,290 ; U2.1 2000.55,2515.73 2000,2516.28 ; C22.2 2125,407.4 P4.2 2125,290 ; C23.1 2140,245 2125,260 2125,290 ; C11.2 2302.6,2507.4 2320,2490 2320,2125 2270.39,2075.39 C3.2@2270.39,2070 ; C11.2@2245,2516.28 2000,2516.28 ; 2270.39,1895 C3.2 ; C1.2 2324.2,1505 2334.2,1515 2334.2,1725 2324.2,1735 2280,1735
  Bottom Layer w30: v1(525,1870) 355,1870 340,1885 P3.10 290,2270 280,2280 280,2470 297.01,2487.01 P7.6@1036.3,2487.01 ; P6.1 880,1260 890,1250 1335,1250 1355,1270 v1(1355,1300) ; P7.6@1036.3,2300 P7.6@1036.3,2487.01 ; P7.6@1323.7,2300 1323.7,2487.01 P7.6@1036.3,2487.01
  other v1: 2060,1755 2060,1801.67 2060,1848.33 2060,1895 525,2005
pads on no net: D4.2 FD201.3 FD202.3 U4.4

## Polygon pours and split planes (outlines as drawn)
VSS on Bottom Layer "Top Layer-No Net" (solid, remove dead copper, pour order 0): 0,2559.06 2362.2,2559.06 2362.2,0 0,0 0,2559.06
VSS on Top Layer "Top Layer-No Net" (solid, remove dead copper, pour order 2): 0,2559.06 2362.2,2559.06 2362.2,0 0,0 0,2559.06

## Keep-outs
Keep-Out Layer:
  the board outline again, w10

## Other copper
Top Layer:
  region net +3V3: 2265,2380 1795,2380 1795,2135 2265,2135
  region net +3V3: 2275,2380 1755,2380 1755,2205 2275,2205
  region net VSS: 2310,1925 2015,1925 2015,1715 2310,1715
Bottom Layer:
  region net +3V3: 2265,2380 1755,2380 1755,2190 2265,2190
  region net +3V3: 2265,2205 1795,2205 1795,2135 2265,2135
  region net VSS: 2295,2015 1870,2015 1870,1590 2295,1590

## Silkscreen, mask and mechanical layers (free items; w line width, h text height)
Top Overlay:
  the board outline again, w10
  text "MIFARE / READER-WRITER" at 1660,1050 h39.37
  text "I-MEDIA GROUP d.o.o. Sarajevo / Federacija BiH,Bosna i Hercegovina / www.imedia.ba       info@imedia.ba" at 560,615 h34.25

## Dimensions
2362.2,2559.06 to 2362.2,0 on Mechanical 1
0,2559.06 to 2362.2,2559.06 on Mechanical 1

## Text inside footprints (layer, text, board x,y; h text height)
P2: Top Overlay "10" at 1725,1370 h30; Top Overlay "9" at 1625,1370 h30; Top Overlay "1" at 1640,1925 h30; Top Overlay "2" at 1735,1925 h30
P3: Top Overlay "10" at 235,2255 h30; Top Overlay "9" at 255,2355 h30; Top Overlay "1" at 805,2355 h30; Top Overlay "2" at 800,2255 h30
P8: Top Overlay "2" at 1495,235 h30; Top Overlay "1" at 1500,335 h30; Top Overlay "7" at 1055,335 h30; Top Overlay "8" at 1055,235 h30